# Altium PCB MOTHERBOARD.PcbDoc (part 3 of 3)
Units mm, origin at the board's own origin, x right, y up, seen from the top; angles counter-clockwise.
Board outline 187.14 x 77.14 mm, 4 copper layers (Top Layer, Top, Mid-Layer 1, Mid-Layer 2, Bottom Layer, Bottom), stack 0.462 mm thick; 249 components, 227 nets, 1108 pads, 518 vias.
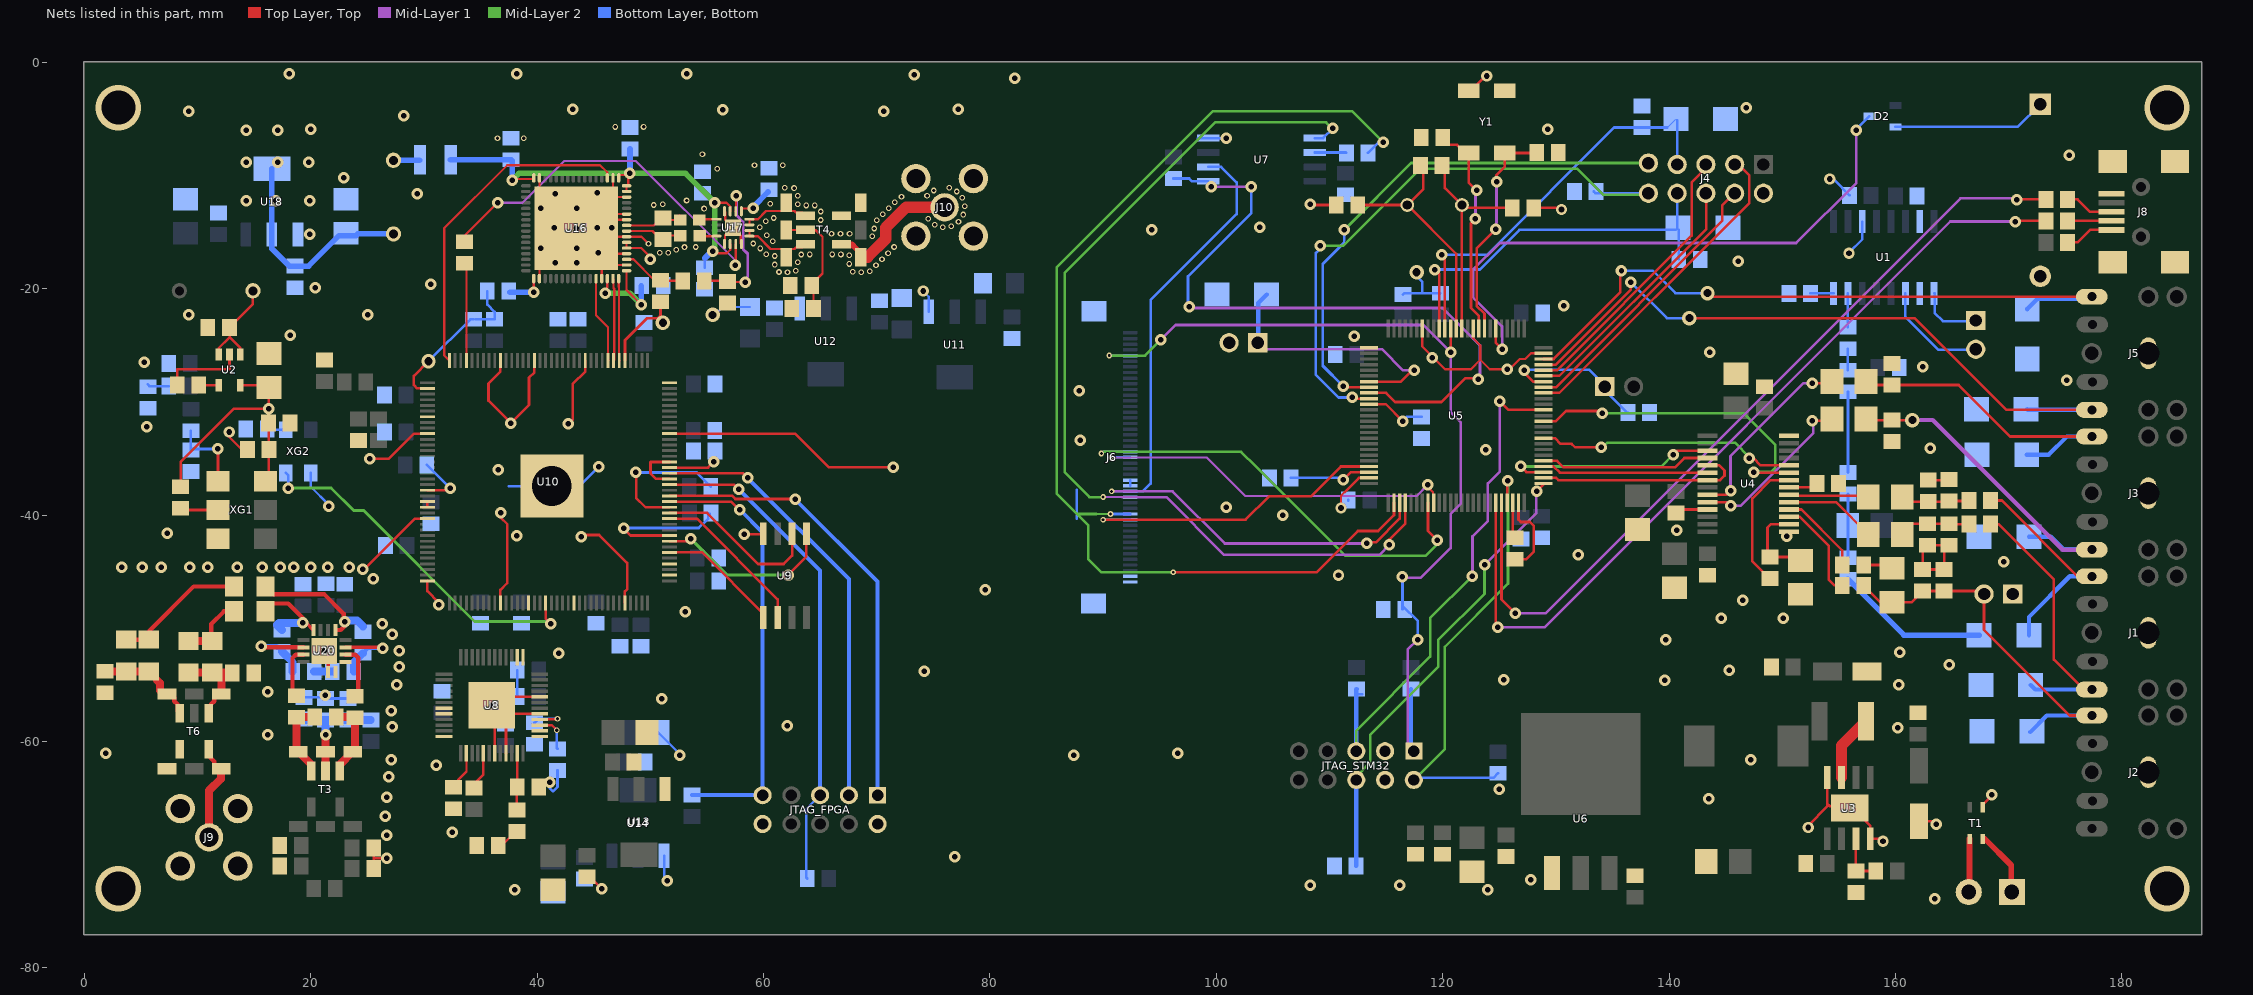
[diagram p5: the nets of this part, all layers, seen from the top]

## Via types
v1: diameter 1.016, hole 0.486, Top Layer, Top to Bottom Layer, Bottom, tented both sides, 338 vias
v2: diameter 0.5, hole 0.3, Top Layer, Top to Bottom Layer, Bottom, tented both sides, 87 vias
v3: diameter 0.5, hole 0.25, Top Layer, Top to Bottom Layer, Bottom, tented both sides, 39 vias
v4: diameter 1, hole 0.5, Top Layer, Top to Bottom Layer, Bottom, 27 vias
v5: diameter 1.27, hole 0.711, Top Layer, Top to Bottom Layer, Bottom, 15 vias
v6: diameter 1.016, hole 0.486, Top Layer, Top to Bottom Layer, Bottom, 7 vias
v7: diameter 4, hole 3, Top Layer, Top to Bottom Layer, Bottom, 4 vias
v8: diameter 0.5, hole 0.2, Top Layer, Top to Bottom Layer, Bottom, tented both sides, 1 vias

## Nets (pads, with @x,y where several pads share a name; then routed paths per layer and width w, separated by ;. In a path a pad name is that pad's centre, name@x,y a point inside that pad or via, vN(x,y) a via of type N, cw(c..) or ccw(c..) an arc to the next point about the centre after c; other vN are vias at no path point) (continued)
GND: B1.2 C1.2 C2.2 C3.1 C4.1 C5.1 C6.1 C7.1 C8.2 C9.1 C10.1 C11.1 C13.2 C14.2 C15.2 C16.2 C17.1 C18.1 C19.2 C20.2 C21.1 C22.2 C23.1 C24.2 C27.1 C28.1 C30.1 C31.1 C32.2 C36.1 C37.1 C38.2 C39.2 C40.1 C41.1 C42.1 C43.1 C44.1 C45.1 C46.1 C47.1 C48.1 C49.1 C50.1 C51.2 C52.2 C53.1 C54.2 C55.1 C56.1 C57.1 C58.1 C59.1 C60.2 C61.2 C62.2 C64.2 C65.2 C66.2 C67.2 C68.2 C69.2 C70.2 C71.1 C72.2 C73.2 C74.2 C75.2 C76.2 C77.2 C78.1 C79.2 C80.2 C81.1 C82.2 C83.1 C84.2 C85.2 C86.2 C87.2 C88.2 C89.1 C90.1 C91.2 C92.1 C93.1 C94.2 C95.2 C96.1 C97.1 C98.2 C99.2 C104.1 C112.2 C113.2 C114.2 C115.2 C116.1 C117.1 C118.1 C119.2 C120.2 C121.2 C122.2 C123.1 C124.1 C125.2 C126.2 C134.1 C135.1 C136.1 C137.1 D29.2 D30.2 D31.2 D34.2 D35.2 D36.2 D37.2 D38.2 D39.2 D40.2 J1.1 J2.1 J3.1 J4.2 J5.1 J6.27 J6.28 J6.44 J6.45 J6.46 J6.47 J8.5 J8.6 J8.7 J8.8 J8.9 J9.1 J9.2 J9.3 J9.4 J10.1 J10.2 J10.3 J10.4 JTAG_FPGA.2 JTAG_FPGA.10 JTAG_STM32.3 JTAG_STM32.4 MIC_IN2.1 PTT_IN.2 R1.1 R5.1 R6.1 R12.1 R13.1 R14.1 R15.1 R16.1 R17.1 R19.2 R22.2 R23.2 R26.2 R27.1 R28.1 R34.1 R35.1 R38.1 R46.1 R48.2 R49.2 R50.2 R56.1 R57.2 T1.1 T4.6 T4.10 T6.4 T6.11 U1.2 U1.11 U1.15 U2.2 U3.4 U3.8 U3.9 U4.11 U4.15 U4.22 U4.28 U5.10 U5.19 U5.26 U5.49 U5.74 U5.99 U6.1 U7.4 U8.1 U8.2 U8.19 U8.20 U8.24 U8.31 U8.33 U8.37 U8.38 U8.41 U8.44 U8.49 U9.4 U10.2 U10.4 U10.19 U10.22 U10.27 U10.36 U10.41 U10.48 U10.57 U10.63 U10.74 U10.79 U10.82 U10.94 U10.95 U10.97 U10.108 U10.118 U10.123 U10.131 U10.140 U10.145 U11.1 U12.1 U13.1 U14.1 U16.2 U16.4 U16.7 U16.10 U16.11 U16.14 U16.18 U16.31 U16.50 U16.61 U16.65 U17.4 U17.9 U17.12 U17.17 U18.1 U20.7 U20.8 U20.9 U20.17 XG1.3 XG2.2 Y1.2 Y1.3 | length 331.6
  Top Layer, Top w0.2: v4(12.8,-32.648) 12.652,-32.648 12.5,-32.8 13.9,-34.2 C10.1@14.4,-34.2 ; U10.95@30.3,-39.3 U10.94@30.3,-38.8 ; U16.50@40.2,-19.1 U16.65@40.2,-17.9 ; U16.65@40.2,-11.4 U16.31@40.2,-10.2 ; U16.65@44.2,-15.4 U16.7@47.9,-15.4 49.213,-15.4 v2(49.836,-16.023) ; U16.65@44.2,-13.9 U16.10@47.9,-13.9 ; U16.65@44.7,-13.4 U16.11@47.9,-13.4 ; U16.61@45.7,-19.1 45.7,-16.9 U16.4@47.9,-16.9 ; U16.65@46.2,-11.9 U16.14@47.9,-11.9 ; U16.65@46.7,-17.9 U16.2@47.9,-17.9 ; U16.65@46.7,-11.4 U16.18@46.7,-10.2 ; U17.9@56.55,-16.05 56.6,-16 56.6,-15.3 v8(57.3,-14.6) ; U17.4@56.55,-13.15 56.615,-13.215 56.615,-13.915 v8(57.3,-14.6) ; U17.12@58.05,-16.05 57.984,-15.984 57.984,-15.284 v8(57.3,-14.6) ; v4(111.017,-39.369) 111.017,-38.283 111.314,-37.986 ; U5.19@118.2,-23.5 118.2,-25.1 119.15,-26.05 120.2,-27.1 122.5,-27.1 123.326,-26.274 123.326,-26.259 ; U5.10@122.7,-23.5 122.7,-24.374 123.326,-25 123.326,-26.259 ; v1(125.7,-27.1) 124.167,-27.1 123.326,-26.259 ; v1@125.95,-27.067 126.817,-26.2 127.3,-26.2 127.8,-25.7 U5.99@128.9,-25.7
  Top Layer, Top w0.23: J9.4@8.114,-66.97 9.244,-65.84 J9.4@9.244,-65.26 ; C11.1@8.208,-28.505 8.193,-28.491 8.193,-27.122 12.813,-27.122 U2.2@12.814,-25.806 ; v1(24.6,-44.8) 24.7,-44.8 29.2,-40.3 U10.97@30.3,-40.3 ; v1(25.2,-35) 26.9,-35 28.7,-33.2 29.1,-32.8 U10.82@30.3,-32.8 ; C17.1@25.55,-71.2 25.55,-70.3 ; R34.1@25.55,-69.4 25.55,-70.3 ; v4(26.7,-70.3) 26.5,-70.3 25.55,-70.3 ; U10.108@30.3,-45.8 30.3,-46.7 31.3,-47.7 v1(31.3,-47.9) ; U10.74@30.3,-28.8 29.393,-28.8 29.1,-28.507 29.1,-27.7 v5(30.4,-26.4) ; U10.118@36.75,-47.75 36.75,-46.615 37.357,-46.008 37.357,-40.798 36.8,-40.241 v1(36.8,-39.8) ; U10.63@36.75,-26.35 36.75,-27.326 35.7,-28.376 35.7,-29.888 v1(37.673,-31.861) 39.278,-30.256 39.278,-27.851 39.75,-27.379 U10.57@39.75,-26.35 ; v1(43.906,-41.885) 44.038,-41.753 45.469,-41.753 47.947,-44.23 47.947,-46.55 47.75,-46.747 U10.140@47.75,-47.75 ; U10.48@44.25,-26.35 44.25,-27.29 43.13,-28.41 43.13,-31.544 ; C83.1@44.4,-71.95 44.65,-71.95 v4(45.7,-73) ; U10.19@51.7,-36.8 50.492,-36.8 50.01,-36.319 50.01,-35.3 U10.22@51.7,-35.3 ; U10.27@51.7,-32.8 62.8,-32.8 65.75,-35.75 v1(71.45,-35.75) ; v1(58.298,-41.703) 59.915,-41.703 U9.4@59.98,-41.638 ; v4(108.3,-12.538) 108.3,-12.5 108.4,-12.6 C43.1@110.6,-12.6 ; 111.314,-37.986 112.6,-36.7 U5.49@113.5,-36.7 ; Y1.3@122.3,-2.5 122.5,-2.5 123.8,-1.2 v4(123.9,-1.2) ; C41.1@126.4,-43.9 127.35,-43.9 128.05,-43.2 128.05,-40.95 127.7,-40.6 126.9,-40.6 126.7,-40.4 U5.74@126.7,-38.9 ; C42.1@128.05,-12.85 130.45,-12.85 130.6,-13 v4(130.5,-13) ; C23.1@140.6,-39.8 140.9,-39.5 U4.11@143.4,-39.5 ; C31.1@148.9,-45.6 148.884,-45.6 147.357,-44.073 147.357,-38.526 148.982,-36.9 U4.22@150.6,-36.9 ; v1(150.389,-41.841) 150.389,-41.662 U4.15@150.6,-41.45 ; v4@152.2,-67.8 152.3,-67.7 v4(152.3,-67.6) 152.3,-67.4 153.971,-65.729 153.971,-65.471 ; U3.8@153.971,-63.174 153.971,-65.471 ; v4@159,-68.9 v4(158.9,-68.8) 158.674,-68.574 U3.4@157.781,-68.574 157.781,-67.481 156.174,-65.874 U3.9@155.976,-65.874 155.802,-65.7 154.2,-65.7 153.971,-65.471 ; C1.2@162.067,-67.052 163.152,-67.052 163.4,-67.3 v4(163.6,-67.3) ; C28.1@162.9,-36.9 164.7,-36.9 R6.1@164.75,-36.85 ; T1.1@167.7,-65.8 167.7,-65.6 168.5,-64.8 v4(168.5,-64.7) ; 43.13,-31.544 v1(42.749,-31.925) 43.13,-31.544 ; C30.1@162.4,-44.8 162.4,-43.1 R5.1@162.85,-42.65 C27.1@164.75,-42.65 164.3,-43.1 R12.1@164.3,-44.8 C30.1@162.4,-44.8
  Top Layer, Top w0.25: U8.31@36.25,-61.038 U8.49@36.25,-57.05 ; U8.33@37.25,-61.038 37.25,-58.05 U8.49@36.75,-57.55 ; U8.41@40.238,-57.55 U8.49@36.75,-57.55 ; U8.44@40.238,-56.05 36.75,-56.05 v4(36,-56.8) U8.49@36.25,-57.05 ; U8.49@36.25,-57.05 U8.49@36.75,-57.55
  Top Layer, Top w0.254: U10.41@47.75,-26.35 47.75,-24.55 49.7,-22.6 50.7,-22.6 v5(51.1,-23) ; v5@50.688,-22.588 50.9,-22.377 C122.2@50.9,-21.15
  Top Layer, Top w0.3: U20.7@21.525,-53.85 U20.17@21.525,-52.325
  Top Layer, Top w0.381: v1(21.2,-52) U20.17@21.525,-52.325 ; U16.65@40.2,-17.9 v1(43.45,-14.65) ; U16.65@40.2,-11.4 v1(43.45,-14.65) ; U16.65@46.7,-17.9 45.7,-16.9 44.2,-15.4 v1(43.45,-14.65) ; U16.65@46.7,-11.4 46.2,-11.9 44.7,-13.4 44.2,-13.9 v1(43.45,-14.65)
  Bottom Layer, Bottom w0.2: XG2.2@19.996,-36.254 19.996,-37.496 21.6,-39.1 v4(21.6,-39.2) ; C75.2@50.7,-59.2 52.6,-61.1 v4(52.6,-61.2) ; v5(55.5,-22.296) 55.504,-22.3 55.686,-22.3 56.386,-21.6 C68.2@58.8,-21.6 ; v4(74.1,-20.2) 74.6,-20.7 U11.1@74.6,-22.028 ; C46.1@111.003,-39.383 v4(111.017,-39.369) C46.1@111.316,-39.07 ; C46.1@111.651,-38.735 C46.1@111.651,-38.647
  Bottom Layer, Bottom w0.23: R49.2@19.4,-56.1 21.2,-56.1 C93.1@21.3,-56.2 C104.1@23.3,-56.2 ; v5(30.4,-26.4) 34.101,-22.699 C82.2@34.378,-22.699 ; C82.2@34.599,-22.699 C74.2@36.241,-22.699 36.241,-22.041 35.6,-21.4 C114.2@35.6,-20.2 ; C96.1@37.2,-58.45 37.2,-58 v4(36,-56.8) 36.2,-56.8 37,-56 C97.1@38.25,-56 C55.1@38.25,-53.7 ; 37.5,-37.45 43.714,-37.45 v1(45.448,-35.717) ; v4(41.1,-63.6) 41.1,-64.1 41.4,-64.4 41.8,-64 C3.1@41.8,-62.55 ; U14.1@51.215,-70.1 51.215,-72.115 51.4,-72.3 v4(51.5,-72.3) ; 87.66,-40.32 87.66,-37.78 ; J6.28@92.4,-37.4 J6.27@92.4,-36.9 ; U7.4@99.3,-6.69 98.372,-6.69 98.382,-6.7 v1(100.9,-6.7) ; C52.2@116.5,-20.5 116.6,-20.4 118.2,-20.4 ; v5(117.7,-18.539) 117.327,-18.539 118.2,-19.412 118.2,-20.4 ; C51.2@119.8,-20.4 118.2,-20.4 ; v4(154.2,-10.3) 154.3,-10.4 154.6,-10.4 C15.2@155.95,-11.75 ; v4(155.9,-16.846) 155.9,-16.8 157.07,-15.63 U1.11@157.07,-14.06
  Bottom Layer, Bottom w0.5: R17.1@155.8,-45.65 160.75,-50.6 D37.2@167.4,-50.6
  other v1: 163.461,-73.881 38,-73.1 124,-73.1 108.3,-72.7 116.2,-72.7 127.8,-72.2 76.9,-70.2 26.7,-68.3 32.5,-68 26.6,-66.6 143.493,-65.075 26.7,-64.9 125,-64.2 26.9,-63.1 31.1,-62.1 27.1,-61.6 147.2,-61.6 87.4,-61.2 1.9,-61.05 96.614,-61.031 16.2,-59.4 160.2,-58.8 27.2,-58.7 62.093,-58.62 27.1,-57.3 51,-56.2 21.269,-55.9 16.2,-55.6 27.6,-55 160.3,-55 139.6,-54.6 125.384,-54.56 74.2,-53.8 145.3,-53.7 27.8,-53.4 164.75,-53.2 41.9,-52.2 160.4,-52.1 27.8,-52 139.7,-51 27.2,-50.5 26.3,-49.6 144.6,-49.1 150.1,-49.1 53.072,-48.53 146.5,-47.5 79.585,-46.59 25.5,-45.6 3.3,-44.6 5.1,-44.6 6.8,-44.6 9.3,-44.6 10.9,-44.6 13.5,-44.6 15.7,-44.6 17.3,-44.6 18.5,-44.6 20,-44.6 21.5,-44.6 23.4,-44.6 169.55,-44.1 132,-43.5 38.2,-41.8 7.3,-41.6 140.684,-41.317 100.9,-39.3 36.58,-35.974 123.8,-34.2 163.066,-34.094 88,-33.4 5.5,-32.2 87.9,-29 175.15,-28.1 162.4,-26.9 5.3,-26.5 119.1,-26.1 143.6,-25.6 112.2,-24.2 18.2,-24.1 9.2,-22.296 25.045,-22.296 130.7,-21.5 20.4,-19.9 41.6,-17.7 43.5,-17.7 146.113,-17.564 45.4,-16.8 40.3,-16.4 43.5,-16.4 19.9,-15.2 94.3,-14.8 41.5,-14.6 45.3,-14.6 46.6,-14.6 103.86,-14.557 40.3,-12.9 43.5,-12.9 29.4,-11.6 41.6,-11.6 45.3,-11.5 22.9,-10.2 175.345,-8.223 129.3,-5.9 28.2,-4.7 9.2,-4.3 70.6,-4.3 56.4,-4.2 43.14,-4.13 77.209,-4.13 146.8,-4 82.2,-1.4 73.3,-1.1 18.1,-1 38.2,-1 53.2,-1
  other v2: 62.118,-18.539 68.646,-18.539 61.364,-18.512 67.893,-18.493 69.393,-18.436 62.857,-18.392 69.935,-17.912 60.986,-17.859 67.586,-17.804 63.014,-17.655 70.468,-17.379 60.986,-17.105 67.586,-17.05 63.334,-16.972 64.088,-16.964 66.083,-16.964 66.837,-16.964 60.247,-16.956 71.002,-16.846 50.84,-16.814 51.594,-16.814 52.297,-16.539 59.704,-16.433 53.016,-16.314 54,-16.311 71.533,-16.311 59.089,-15.996 60.82,-15.791 69.6,-15.35 60.287,-15.257 66,-15.15 66.8,-15.15 67.6,-15.15 69.776,-14.67 59.678,-14.564 75.838,-14.558 76.586,-14.466 75.119,-14.331 77.229,-14.071 60.205,-14.025 70.013,-13.954 65.046,-13.923 74.561,-13.824 60.906,-13.747 77.643,-13.442 70.539,-13.414 65.049,-13.169 54.745,-12.911 71.072,-12.88 77.766,-12.698 63.761,-12.636 64.515,-12.636 50.3,-12.6 51.1,-12.538 63.014,-12.538 60.6,-12.5 71.605,-12.347 53.2,-12.2 77.565,-11.971 72.191,-11.872 63.014,-11.784 74.447,-11.776 77.073,-11.4 75.041,-11.313 62.697,-11.1 76.393,-11.073 61.86,-11.061 55.9,-9.4 59.2,-9.1 61.7,-9.1 54.6,-8.1 36.5,-6.69 38.8,-6.69 46.9,-5.7 49.4,-5.7
  other v4: 110.8,-45.3 105.883,-40.016
  other v6: 30.6,-19.6
  other v7: 3,-73 184,-73 3,-4 184,-4
KEY_IN_DASH: D34.1 J5.3 U5.97 | length 62.3
  Top Layer, Top w0.23: U5.97@128.9,-26.7 129.992,-26.7 136.6,-20.092 v1(136.6,-19.4) ; v5(141.8,-22.6) 161.7,-22.6 169.8,-30.7 J5.3@177.35,-30.7
  Bottom Layer, Bottom w0.23: v1(136.6,-19.4) 139.8,-22.6 v5(141.8,-22.6)
  Bottom Layer, Bottom w0.381: D34.1@171.65,-30.65 171.7,-30.7 J5.3@177.35,-30.7
KEY_IN_DOT: D35.1 J5.2 U5.98 | length 60.2
  Top Layer, Top w0.23: U5.98@128.9,-26.2 129.8,-26.2 135.7,-20.3 135.7,-18.5 v1(135.8,-18.4) ; v5(143.4,-20.39) 143.71,-20.7 J5.2@177.35,-20.7
  Mid-Layer 2 w0.23: v1(135.8,-18.4) 135.8,-18.45 135.95,-18.6 v1@135.973,-18.577
  Bottom Layer, Bottom w0.23: v1(135.8,-18.4) 138.561,-18.4 140.551,-20.39 v5(143.4,-20.39)
  Bottom Layer, Bottom w0.381: D35.1@171.65,-21.8 171.65,-21.775 172.535,-20.89 177.16,-20.89 J5.2@177.35,-20.7
Net13.8V_1: 13.8V.1 T1.2 | length 5.7
  Top Layer, Top w0.23: 13.8V.1@170.233,-73.3 13.8V.1@170.288,-73.3
  Top Layer, Top w0.5: 167.9,-68.6 170.233,-70.933 13.8V.1@170.233,-73.3
Net13.8V_2: 13.8V.2 T1.4 | length 4.7
  Top Layer, Top w0.5: 13.8V.2@166.478,-73.3 13.8V.2@166.483,-73.295 ; 13.8V.2@166.55,-73.295 T1.4@166.55,-68.6
NetB1_1: B1.1 D2.2 | length 13.6
  Bottom Layer, Bottom w0.23: D2.2@160,-5.7 170.8,-5.7 B1.1@172.8,-3.7
NetBOOT_1: BOOT.1 R28.2 U5.94 | length 13.7
  Top Layer, Top w0.23: v1@127.345,-27.144 126.944,-27.144 127.144,-27.344 128,-28.2 U5.94@128.9,-28.2
  Bottom Layer, Bottom w0.23: v1@127.345,-27.144 132.944,-27.144 134,-28.2 134,-28.641 136.306,-30.947 R28.2@136.381,-30.947
  other v1: 127.2,-27.2
NetC3_2: C3.2 U8.39 | length 3.4
  Top Layer, Top w0.23: U8.39@40.238,-58.55 41.288,-58.55 v2(41.738,-59)
  Bottom Layer, Bottom w0.23: v2(41.738,-59) 41.738,-60.588 C3.2@41.8,-60.65
NetC7_2: C7.2 L3.2 U2.1 U2.3 | length 8.8
  Top Layer, Top w0.23: U2.3@11.864,-25.806 11.864,-25.253 12.823,-24.294 12.823,-24.257 ; U2.1@13.764,-25.806 13.764,-25.198 12.823,-24.257 ; L3.2@14.887,-20.176 14.887,-21.35 C7.2@12.809,-23.428 12.823,-23.442 12.823,-24.257
NetC8_1: C8.1 C9.2 C10.2 C137.2 R3.1 U2.5 XG1.6 XG2.4 | length 26.8
  Top Layer, Top w0.23: R3.1@8.5,-37.5 8.5,-35.3 13.209,-30.591 v1(16.271,-30.591) ; U2.5@13.764,-28.507 16.089,-28.507 C8.1@16.3,-28.718 16.271,-28.747 v1(16.271,-30.591) ; XG1.6@16.2,-36.8 16.3,-36.7 C10.2@16.3,-34.2 16.271,-34.171 C9.2@16.271,-31.841 v1(16.271,-30.591) ; XG1.6@16.2,-36.8 XG1.6@16,-37 XG1.6@16.2,-36.8
  Bottom Layer, Bottom w0.23: C137.2@16.15,-32.4 16.204,-32.454 C137.2@16.271,-32.454 ; v1(16.271,-30.591) C137.2@16.271,-32.454 ; XG2.4@17.796,-32.454 C137.2@16.271,-32.454
NetC11_2: C11.2 U2.4 | length 1.8
  Top Layer, Top w0.23: C11.2@10.108,-28.505 10.109,-28.507 U2.4@11.864,-28.507
NetC12_1: C12.1 R8.2 | length 1.9
  Bottom Layer, Bottom w0.23: C12.1@155.8,-27.2 R8.2@155.8,-25.3
NetC12_2: C12.2 R18.2 | length 7.1
  Bottom Layer, Bottom w0.25: R18.2@155.8,-36.23 C12.2@155.8,-29.1
NetC13_1: C13.1 U1.8 | length 2
  Bottom Layer, Bottom w0.23: C13.1@152.5,-20.4 152.51,-20.41 U1.8@154.53,-20.41
NetC25_1: C25.1 U4.20 | length 7.1
  Top Layer, Top w0.23: U4.20@150.6,-38.2 150.6,-38.3 157.5,-38.3 C25.1@157.6,-38.4
NetC25_2: C25.2 C28.2 R6.2 R7.2 | length 6.1
  Top Layer, Top w0.23: C25.2@160.6,-38.4 161,-38.8 C28.2@162.9,-38.8 164.7,-38.8 R6.2@164.75,-38.75 166.45,-38.75 R7.2@166.5,-38.7
NetC26_1: C26.1 U4.19 | length 8.2
  Top Layer, Top w0.23: U4.19@150.6,-38.85 154.75,-38.85 C26.1@157.6,-41.7
NetC26_2: C26.2 C27.2 R5.2 R9.2 | length 6.3
  Top Layer, Top w0.23: C26.2@160.6,-41.7 161.55,-40.75 R5.2@162.85,-40.75 C27.2@164.75,-40.75 164.8,-40.8 R9.2@166.5,-40.8
NetC29_1: C29.1 R10.1 | length 2.6
  Top Layer, Top w0.23: R10.1@157.2,-44.4 159.4,-44.4 C29.1@159.7,-44.7
NetC29_2: C29.2 C30.2 D38.1 J2.2 MIC_IN2.2 R11.1 R12.2 | length 32.7
  Top Layer, Top w0.23: R11.1@157.2,-46.2 158.7,-47.7 C29.2@159.7,-47.7 161.4,-47.7 C30.2@162.4,-46.7 167,-46.7 ; MIC_IN2.2@167.83,-46.965 167.83,-50.13 175.4,-57.7 J2.2@177.35,-57.7
  Bottom Layer, Bottom w0.381: D38.1@171.9,-59.15 171.925,-59.15 173.375,-57.7 J2.2@177.35,-57.7
NetC31_2: C31.2 C32.1 U4.16 | length 7.5
  Top Layer, Top w0.23: U4.16@150.6,-40.8 149,-40.8 148.7,-41.1 148.7,-43.5 C31.2@148.9,-43.7 151.3,-43.7 C32.1@151.6,-44
NetC33_1: C33.1 U4.9 | length 16.9
  Top Layer, Top w0.23: U4.9@143.4,-38.2 145.074,-38.2 v1(145.431,-37.843) ; v1(152.672,-28.35) 154.25,-28.35 C33.1@154.4,-28.2
  Mid-Layer 1 w0.23: v1(145.431,-37.843) 145.431,-34.769 151.85,-28.35 v1(152.672,-28.35)
NetC33_2: C33.2 D40.1 J3.2 R15.2 | length 28.4
  Top Layer, Top w0.23: C33.2@157.4,-28.2 157.7,-28.5 R15.2@159.7,-28.5 165.592,-28.5 170.142,-33.05 J3.2@177.35,-33.05
  Bottom Layer, Bottom w0.381: D40.1@171.6,-34.65 173.55,-34.65 175.15,-33.05 J3.2@177.35,-33.05
NetC34_1: C34.1 U4.10 | length 15
  Top Layer, Top w0.23: U4.10@143.4,-38.85 145.154,-38.85 v1(145.468,-39.164) ; v1(152.672,-31.644) 154.256,-31.644 C34.1@154.4,-31.5
  Mid-Layer 1 w0.23: v1(145.468,-39.164) 146.343,-39.164 152.727,-32.78 152.727,-31.7 v1(152.672,-31.644)
NetC34_2: C34.2 D39.1 J3.3 R14.2 | length 31.2
  Top Layer, Top w0.23: C34.2@157.4,-31.5 157.5,-31.6 R14.2@159.7,-31.6 v5(161.5,-31.6)
  Mid-Layer 1 w0.381: v5(161.5,-31.6) 163.3,-31.6 174.75,-43.05 J3.3@177.35,-43.05
  Bottom Layer, Bottom w0.381: v5@161,-31.644 161.044,-31.6 v5(161.5,-31.6) ; D39.1@171.8,-41.9 173.726,-41.9 174.826,-43 J3.3@177.3,-43
NetC35_2: C35.2 R17.2 R18.1 | length 5.6
  Bottom Layer, Bottom w0.25: R17.2@155.8,-43.75 R18.1@155.8,-38.13
NetC36_2: C36.2 R44.2 U8.35 | length 5
  Top Layer, Top w0.2: R44.2@38.2,-66.05 38.2,-64.05 C36.2@38.25,-64 U8.35@38.25,-61.038
NetC37_2: C37.2 R44.1 | length 1.9
  Top Layer, Top w0.2: C37.2@36.85,-69.2 38.1,-67.95 R44.1@38.2,-67.95
NetC38_1: C38.1 U5.8 Y1.1 | length 19.6
  Top Layer, Top w0.23: U5.8@123.7,-23.5 123.7,-22.2 123,-21.5 123,-16.428 v1(124.703,-14.726) v1@124.7,-14.726 ; v1(124.757,-10.556) 124.757,-9.943 125.5,-9.2 Y1.1@125.5,-8 128.25,-8 C38.1@128.3,-7.95
  Mid-Layer 1 w0.23: v1(124.703,-14.726) 124.757,-14.671 v1(124.757,-10.556)
NetC39_1: C39.1 U5.9 Y1.4 | length 19.4
  Top Layer, Top w0.23: C39.1@120.15,-6.8 C39.1@120,-6.65 120,-6.75 120.535,-7.285 121.285,-7.285 122,-8 Y1.4@122.3,-8 122.3,-10.6 v1(123,-11.3) ; v1(122.9,-13.8) 122.5,-14.2 122.5,-21.7 123.2,-22.4 U5.9@123.2,-23.5
  Mid-Layer 1 w0.23: v1(122.9,-13.8) 122.9,-11.4 v1(123,-11.3)
NetC40_2: C40.2 U5.48 | length 7.3
  Top Layer, Top w0.23: v1(111.2,-36.882) 111.882,-36.2 U5.48@113.5,-36.2
  Bottom Layer, Bottom w0.25: C40.2@106.599,-36.7 111.018,-36.7 v1(111.2,-36.882)
NetC41_2: C41.2 U5.73 | length 3.2
  Top Layer, Top w0.23: U5.73@126.2,-38.9 126.2,-41.8 C41.2@126.4,-42
NetC42_2: C42.2 R29.1 U5.12 Y2.1 | length 19.7
  Top Layer, Top w0.23: R29.1@120.2,-9 120.2,-11.1 Y2.1@121.7,-12.6 ; U5.12@121.7,-23.5 Y2.1@121.7,-12.6 ; C42.2@126.15,-12.85 121.95,-12.85 Y2.1@121.7,-12.6
NetC43_2: C43.2 R29.2 U5.13 Y2.2 | length 21.3
  Top Layer, Top w0.23: C43.2@112.5,-12.6 Y2.2@116.874,-12.6 ; R29.2@118.3,-9 118.3,-11.174 Y2.2@116.874,-12.6 ; U5.13@121.2,-23.5 121.2,-16.926 Y2.2@116.874,-12.6
NetC63_2: C63.2 U8.29 | length 4.3
  Top Layer, Top w0.23: C63.2@34.382,-63.782 35.25,-62.915 U8.29@35.25,-61.038 ; C63.2@34.698,-64.629 34.698,-64.021 C63.2@34.819,-63.9 ; C63.2@34.698,-63.779 C63.2@34.819,-63.9 ; C63.2@35.019,-64.1 C63.2@34.819,-63.9
NetC93_2: C93.2 C104.2 R25.1 R49.1 T3.2 T3.8 | length 10.5
  Top Layer, Top w0.7: T3.8@21.3,-62.61 T3.2@21.3,-60.9 v1(21.3,-59.4)
  Bottom Layer, Bottom w0.7: R49.1@19.4,-58 19.4,-58.1 C93.2@21.3,-58.1 ; v1(21.3,-59.4) C93.2@21.3,-58.1 ; R25.1@25.3,-58.1 C104.2@23.3,-58.1 C93.2@21.3,-58.1
NetC102_1: C102.1 C106.1 R56.2 T6.1 T6.7 | length 8.2
  Top Layer, Top w0.381: T6.7@10.97,-57.51 11.16,-57.32 11.16,-56.74 11.465,-56.434 11.465,-56.109 11.775,-55.8 T6.1@12.1,-55.8 ; C102.1@12.1,-53.95 C102.1@12.15,-53.9
  Top Layer, Top w0.7: C106.1@9.2,-53.9 C102.1@11.3,-53.9 12.15,-53.9 13,-53.9 R56.2@13.05,-53.95 ; T6.1@12.1,-55.8 C102.1@12.1,-53.95
NetC102_2: C102.2 C106.2 R62.1 | length 5.9
  Top Layer, Top w0.381: C102.2@11.1,-51.1 11.2,-51 11.2,-49.622 12.322,-48.5 R62.1@13.2,-48.5
  Top Layer, Top w0.7: C106.2@9.2,-51.1 C102.2@11.1,-51.1
NetC103_1: C103.1 C105.1 R57.1 T6.3 T6.9 | length 9.2
  Top Layer, Top w0.381: C105.1@5.7,-53.8 5.8,-53.8 6.409,-54.41 C105.1@6.409,-54.585 ; T6.3@6.665,-55.49 6.975,-55.8 T6.3@7.3,-55.8 7.625,-55.8 7.934,-56.109 7.934,-56.434 8.24,-56.74 8.24,-57.32 T6.9@8.43,-57.51
  Top Layer, Top w0.7: R57.1@1.8,-53.8 C103.1@3.7,-53.8 C105.1@5.7,-53.8 ; C105.1@6.409,-54.585 6.665,-54.84 T6.3@6.665,-55.49
NetC103_2: C103.2 C105.2 R63.1 | length 11.9
  Top Layer, Top w0.381: C103.2@3.7,-51 C105.2@5.7,-51 5.7,-50.25 9.65,-46.3 R63.1@13.2,-46.3
NetC107_1: C107.1 R60.2 U20.11 | length 7.3
  Top Layer, Top w0.3: U20.11@23.05,-51.675 v1@26.244,-51.675
  Top Layer, Top w0.381: v1@26.244,-51.675 26.26,-51.66 v1(26.37,-51.77)
  Bottom Layer, Bottom w0.381: R60.2@24.6,-52.2 25.06,-51.741 26.341,-51.741 v1(26.37,-51.77)
  Bottom Layer, Bottom w0.7: C107.1@23.8,-53.8 23.8,-53 R60.2@24.6,-52.2
NetC107_2: C107.2 R61.2 | length 1.6
  Bottom Layer, Bottom w0.7: R61.2@20.3,-53.8 C107.2@21.9,-53.8
NetC112_1: C112.1 C113.1 C114.1 C115.1 C117.2 C118.2 C120.1 L7.2 U16.1 U16.5 U16.6 U16.15 U16.16 U16.17 U16.32 U16.49 U16.62 U17.1 U17.3 U17.10 | length 63.5
  Top Layer, Top w0.2: v1(37.8,-10.4) 37.9,-10.3 39.654,-10.3 39.7,-10.254 U16.32@39.7,-10.2 ; v1(39.7,-20.3) U16.49@39.7,-19.1 ; 46.2,-19.879 U16.62@46.2,-19.1 ; U16.17@47.2,-10.2 47.2,-10.002 47.246,-9.956 48.044,-9.956 v1@48.05,-9.95 ; U16.1@47.9,-18.4 47.9,-20.1 v1(49.2,-21.4) ; U16.6@47.9,-15.9 U16.5@47.9,-16.4 49.2,-16.4 50,-17.2 v1(50,-17.4) ; U16.15@47.9,-11.4 U16.16@47.9,-10.9 48.004,-10.9 48.05,-10.854 v1@48.05,-9.95 ; v1(48.2,-9.8) v1@48.05,-9.95 ; v1(55.5,-16.7) 55.65,-16.85 56.747,-16.85 57.05,-16.547 U17.10@57.05,-16.05 ; v1(55.7,-12.4) 56.726,-12.4 57.05,-12.724 U17.3@57.05,-13.15 ; U17.1@58.05,-13.15 58.05,-12.936 58.073,-12.912 59.088,-12.912 v1(59.1,-12.9)
  Mid-Layer 1 w0.5: v1(46,-20.39) v1@46.01,-20.4
  Mid-Layer 2 w0.5: v1(37.8,-10.4) 38.4,-9.8 v1(48.2,-9.8) 53.1,-9.8 v1(55.7,-12.4) 55.7,-16.5 v1(55.5,-16.7) ; v1(46,-20.39) 48.19,-20.39 v1(49.2,-21.4)
  Bottom Layer, Bottom w0.2: C114.1@37.5,-20.2 C114.1@37.6,-20.3 ; C113.1@37.7,-8.6 C113.1@37.8,-8.7 ; C112.1@49.2,-19.75 C112.1@49.25,-19.7 ; C120.1@54.8,-18.15 54.8,-17.3 ; v1(59.1,-12.9) v1@59.1,-12.75 ; C117.2@60.4,-11.45 C117.2@60.5,-11.45
  Bottom Layer, Bottom w0.5: L7.2@32.35,-8.6 34.8,-8.6 C113.1@37.7,-8.6 ; C114.1@37.6,-20.3 v1(39.7,-20.3) ; v1(37.8,-10.4) C113.1@37.8,-8.7 ; v1(48.2,-9.8) C115.1@48.2,-7.65 ; v1(49.2,-21.4) C112.1@49.2,-19.75 ; 54.8,-17.3 55.5,-16.6 v1(55.5,-16.7) ; v1@59.1,-12.75 C117.2@60.4,-11.45
NetC116_2: C116.2 C119.1 T4.2 T4.8 | length 10.2
  Top Layer, Top w0.2: T4.2@62,-14.8 T4.8@63.71,-14.8 64.6,-14.8 65.2,-15.4 65.2,-18.65 64.25,-19.6 C119.1@64.25,-19.7 64.405,-19.855 C116.2@64.405,-21.727
NetC121_1: C121.1 R67.1 U17.2 | length 13.2
  Top Layer, Top w0.2: R67.1@54.75,-19.3 56.75,-19.3 C121.1@56.8,-19.35 56.85,-19.4 v1(58.4,-19.4) ; U17.2@57.55,-13.15 57.56,-13.14 57.56,-11.84 v1(57.6,-11.8)
  Mid-Layer 1 w0.25: v1(57.6,-11.8) 57.6,-13.5 58.2,-14.1 58.2,-16.5 58.6,-16.9 58.6,-19.2 v1(58.4,-19.4)
NetC122_1: C122.1 R67.2 U16.3 | length 5.7
  Top Layer, Top w0.2: U16.3@47.9,-17.4 48.5,-17.4 50.35,-19.25 C122.1@50.9,-19.25 50.95,-19.3 R67.2@52.85,-19.3
NetC124_2: C124.2 C126.1 L8.1 U18.2 U18.4 | length 19.6
  Bottom Layer, Bottom w0.2: C126.1@24,-15.3 C126.1@24.15,-15.15
  Bottom Layer, Bottom w0.5: U18.4@16.561,-9.4 U18.2@16.561,-15.2 16.561,-16.461 18.1,-18 C124.2@18.604,-18 ; C124.2@18.604,-17.995 19.805,-17.995 22.5,-15.3 C126.1@24,-15.3 ; C126.1@24.15,-15.15 L8.1@27.3,-15.15
  other v1: 14.3,-12.2 16.9,-12.2 19.9,-12.2 14.3,-8.8 17.1,-8.8 19.8,-8.8 14.3,-6 17.1,-6 20,-5.9
NetC127_1: C127.1 R69.2 U16.8 | length 5.2
  Top Layer, Top w0.2: U16.8@47.9,-14.9 50.2,-14.9 50.7,-15.4 C127.1@51.15,-15.4 ; C127.1@51.45,-15.3 R69.2@52.413,-15.3
  Top Layer, Top w0.381: C127.1@51.1,-15.65 C127.1@51.45,-15.3 ; R69.2@52.413,-15.3 R69.2@52.582,-15.132
NetC127_2: C127.2 R68.2 U16.9 | length 5.1
  Top Layer, Top w0.2: U16.9@47.9,-14.4 50.3,-14.4 50.8,-13.9 C127.2@51.15,-13.9 ; C127.2@51.275,-13.925 R68.2@52.288,-13.925
  Top Layer, Top w0.381: C127.2@51.1,-13.75 C127.2@51.275,-13.925 ; R68.2@52.288,-13.925 R68.2@52.582,-13.632
NetC135_2: C135.2 R45.2 XG1.1 | length 7
  Top Layer, Top w0.23: XG1.1@11.8,-37 v1(11.8,-34.15)
  Bottom Layer, Bottom w0.23: R45.2@9.4,-32.55 C135.2@9.4,-34.25 9.5,-34.15 v1(11.8,-34.15)
NetC136_2: C136.2 R51.2 | length 1.9
  Bottom Layer, Bottom w0.23: C136.2@5.6,-28.45 5.75,-28.6 R51.2@7.45,-28.6
NetD2_3: D2.3 U5.6 | length 53.6
  Top Layer, Top w0.23: U5.6@124.7,-23.5 124.7,-24.781 v1(125.26,-25.34)
  Mid-Layer 1 w0.23: v1(125.26,-25.34) 125.26,-23.333 122.7,-20.773 122.7,-18.3 125.049,-15.951 151.233,-15.951 156.548,-10.635 156.548,-6.005 v1(156.556,-5.997)
  Bottom Layer, Bottom w0.23: v1(156.556,-5.997) 156.556,-5.894 D2.3@157.7,-4.75
NetD36_1: D36.1 J1.3 R9.1 | length 24.7
  Top Layer, Top w0.23: R9.1@168.4,-40.8 169.1,-40.8 174,-45.7 174,-52.75 176.65,-55.4 J1.3@177.35,-55.4
  Bottom Layer, Bottom w0.381: D36.1@171.95,-55 172.35,-55.4 J1.3@177.35,-55.4
NetD37_1: D37.1 J1.2 R7.1 | length 20.4
  Top Layer, Top w0.23: R7.1@168.4,-38.7 169.4,-38.7 176.1,-45.4 J1.2@177.35,-45.4
  Bottom Layer, Bottom w0.381: D37.1@171.8,-50.6 171.8,-49 175.4,-45.4 J1.2@177.35,-45.4
NetJ8_1: J8.1 R41.2 | length 4.4
  Top Layer, Top w0.23: R41.2@175.2,-15.9 176.1,-15.9 177.2,-14.8 J8.1@179.1,-14.8
NetJ8_2: J8.2 R43.1 | length 3.9
  Top Layer, Top w0.23: R43.1@175.2,-14 J8.2@179.1,-14
NetJ8_3: J8.3 R42.1 | length 4.4
  Top Layer, Top w0.23: R42.1@175.2,-12.1 176.1,-12.1 177.2,-13.2 J8.3@179.1,-13.2
NetJ9_5: J9.5 T6.6 T6.10 | length 8.9
  Top Layer, Top w0.381: T6.10@10.97,-60.69 11.16,-60.879 11.16,-61.46 11.465,-61.766 11.465,-62.09 11.775,-62.4 T6.6@12.1,-62.4 T6.6@12.05,-62.45
  Top Layer, Top w0.7: J9.5@11.014,-68.465 11.014,-64.336 12.05,-63.3 T6.6@12.05,-62.45
NetJ10_5: J10.5 T4.4 T4.11 | length 12.3
  Top Layer, Top w0.2: T4.4@68.2,-16.475 68.6,-16.875 T4.4@68.6,-17.2
  Top Layer, Top w0.5: T4.11@66.89,-16.07 67.795,-16.07 T4.4@68.2,-16.475 ; T4.4@68.6,-17.2 69.2,-17.2 ; J10.5@75.922,-12.878 J10.5@76,-12.8
  Top Layer, Top w1: 69.2,-17.2 70.8,-15.6 70.8,-14.6 72.6,-12.8 J10.5@76,-12.8
NetJTAG_FPGA_1: JTAG_FPGA.1 U10.16 | length 40.4
  Top Layer, Top w0.23: U10.16@51.7,-38.3 57.236,-38.3 57.511,-38.575 62.775,-38.575 v1(62.8,-38.6)
  Bottom Layer, Bottom w0.35: v1(62.8,-38.6) 70.079,-45.879 JTAG_FPGA.1@70.079,-64.745
NetJTAG_FPGA_3: JTAG_FPGA.3 U10.20 | length 38.8
  Top Layer, Top w0.23: U10.20@51.7,-36.3 58.2,-36.3 v1(58.6,-36.7)
  Bottom Layer, Bottom w0.35: v1(58.6,-36.7) 67.539,-45.639 JTAG_FPGA.3@67.539,-64.745
NetJTAG_FPGA_5: JTAG_FPGA.5 R31.1 U10.18 | length 44.2
  Top Layer, Top w0.23: U10.18@51.7,-37.3 57.39,-37.3 v1@57.795,-37.705
  Bottom Layer, Bottom w0.23: R31.1@63.85,-72.1 63.761,-72.011 63.761,-65.982 JTAG_FPGA.5@64.999,-64.745
  Bottom Layer, Bottom w0.35: v1(57.8,-37.7) 64.999,-44.899 JTAG_FPGA.5@64.999,-64.745
NetJTAG_FPGA_9: JTAG_FPGA.9 R32.1 U10.15 | length 38.8
  Top Layer, Top w0.23: U10.15@51.7,-38.8 57.128,-38.8 57.828,-39.5 v1(57.9,-39.5)
  Bottom Layer, Bottom w0.3: JTAG_FPGA.9@59.893,-64.719 JTAG_FPGA.9@59.919,-64.745
  Bottom Layer, Bottom w0.35: R32.1@53.689,-64.719 JTAG_FPGA.9@59.893,-64.719 ; v1(57.9,-39.5) 59.919,-41.519 JTAG_FPGA.9@59.919,-64.745
NetL1_1: L1.1 U3.7 | length 5.9
  Top Layer, Top w1: U3.7@155.241,-63.174 155.241,-60.359 L1.1@157.4,-58.2
NetL7_1: L7.1 L8.2 | length 2.4
  Bottom Layer, Bottom w0.2: L7.1@29.6,-8.65 L7.1@29.65,-8.6
  Bottom Layer, Bottom w0.5: L8.2@27.3,-8.65 L7.1@29.6,-8.65
NetR1_2: R1.2 R2.1 U3.3 | length 4.6
  Top Layer, Top w0.23: R1.2@156.511,-71.433 158.252,-71.433 R2.1@158.26,-71.426 ; R1.2@156.511,-71.433 U3.3@156.511,-68.574
NetR3_2: R3.2 XG1.2 | length 3.4
  Top Layer, Top w0.23: R3.2@8.5,-39.4 8.64,-39.54 XG1.2@11.8,-39.54
NetR8_1: R8.1 U1.7 | length 3
  Bottom Layer, Bottom w0.23: R8.1@155.8,-23.4 U1.7@155.8,-20.41
NetR10_2: R10.2 U4.18 | length 7.5
  Top Layer, Top w0.23: U4.18@150.6,-39.5 151.7,-39.5 155.3,-43.1 R10.2@155.3,-44.4
NetR11_2: R11.2 U4.17 | length 9
  Top Layer, Top w0.23: U4.17@150.6,-40.15 151.55,-40.15 154.1,-42.7 154.1,-45.7 154.6,-46.2 R11.2@155.3,-46.2
NetR13_2: R13.2 U4.21 | length 2.6
  Top Layer, Top w0.23: U4.21@150.6,-37.55 152.732,-37.55 R13.2@153.078,-37.204
NetR16_2: R16.2 U8.40 | length 3.8
  Top Layer, Top w0.23: U8.40@40.238,-58.05 40.263,-58.025 41.775,-58.025 v2(41.8,-58)
  Bottom Layer, Bottom w0.23: R16.2@39.75,-58.35 40.1,-58 v2(41.8,-58)
NetR24_2: R24.2 U10.92 | length 5
  Top Layer, Top w0.23: U10.92@30.3,-37.8 32.1,-37.8 v1(32.3,-37.6)
  Bottom Layer, Bottom w0.23: R24.2@30.25,-35.55 v1(32.3,-37.6)
NetR27_2: R27.2 U5.36 | length 5.4
  Top Layer, Top w0.23: U5.36@113.5,-30.2 114.977,-30.2 v1(116.467,-31.69)
  Bottom Layer, Bottom w0.23: v1(116.467,-31.69) 116.838,-31.319 R27.2@118.147,-31.319
NetR30_1: R30.1 U10.9 | length 12.6
  Top Layer, Top w0.23: v1(47.629,-41.162) 48.267,-41.8 U10.9@51.7,-41.8
  Bottom Layer, Bottom w0.23: v1(47.629,-41.162) 47.657,-41.135 54.265,-41.135 55.123,-40.277 55.123,-39.966 R30.1@55.224,-39.866
NetR40_1: R40.1 U7.6 | length 2.8
  Bottom Layer, Bottom w0.23: U7.6@108.7,-7.96 111.46,-7.96 R40.1@111.495,-7.995
NetR42_2: R42.2 U5.71 | length 72.4
  Top Layer, Top w0.23: U5.71@125.2,-38.9 125.2,-47.455 v1(126.417,-48.672) ; v1(170.704,-12.124) 170.729,-12.1 R42.2@173.3,-12.1
  Mid-Layer 1 w0.23: v1(126.417,-48.672) 129.082,-48.672 165.741,-12.014 170.594,-12.014 v1(170.704,-12.124)
NetR43_2: R43.2 U5.70 | length 74.4
  Top Layer, Top w0.23: U5.70@124.7,-38.9 124.7,-49.73 v1(124.881,-49.911) ; v1(170.573,-14.056) 170.628,-14 R43.2@173.3,-14
  Mid-Layer 1 w0.23: v1(124.881,-49.911) 128.989,-49.911 164.844,-14.056 v1(170.573,-14.056)
NetR46_2: R46.2 U8.26 | length 3.5
  Top Layer, Top w0.2: R46.2@32.6,-64.05 32.7,-64.05 33,-63.75 33,-63.4 33.75,-62.65 U8.26@33.75,-61.038
NetR47_1: R47.1 U10.14 | length 12.7
  Top Layer, Top w0.23: v1(48.719,-36.23) 48.747,-36.23 48.747,-38.464 49.582,-39.3 U10.14@51.7,-39.3
  Bottom Layer, Bottom w0.23: v1(48.719,-36.23) 54.088,-36.23 R47.1@55.324,-37.466
NetR48_1: R48.1 U10.21 | length 4.1
  Top Layer, Top w0.23: U10.21@51.7,-35.8 55.1,-35.8 v1(55.6,-35.3)
NetR53_1: R53.1 R58.2 T3.1 T3.7 | length 6.9
  Top Layer, Top w0.7: R53.1@22.25,-57.85 23.85,-57.85 R58.2@23.9,-57.9 23.9,-60.7 T3.1@23.7,-60.9 22.57,-62.03 T3.7@22.57,-62.61
NetR53_2: R53.2 R54.1 T3.3 T3.9 | length 6.9
  Top Layer, Top w0.7: T3.9@20.03,-62.61 20.03,-62.03 T3.3@18.9,-60.9 18.75,-60.75 R54.1@18.75,-57.85 R53.2@20.35,-57.85
NetR54_2: R54.2 U20.3 | length 4.6
  Top Layer, Top w0.381: R54.2@18.7,-55.9 18.385,-55.585 18.385,-52.618 18.677,-52.325 U20.3@19.35,-52.325
  Top Layer, Top w0.7: R54.2@18.7,-55.9 R54.2@18.75,-55.95
NetR58_1: R58.1 U20.10 | length 4.8
  Top Layer, Top w0.381: U20.10@23.05,-52.325 23.925,-52.325 24.2,-52.6 24.2,-55.7 R58.1@23.9,-56
NetR59_1: R59.1 R62.2 U20.16 | length 8.7
  Top Layer, Top w0.3: v1@19.592,-49.517 U20.16@20.225,-50.15
  Top Layer, Top w0.381: R62.2@16,-48.5 16.7,-47.8 18,-47.8 19.283,-49.083 v1(19.283,-49.517) v1@19.592,-49.517
  Bottom Layer, Bottom w0.7: R59.1@17.45,-50.15 17,-49.7 17.183,-49.517 v1(19.283,-49.517)
NetR59_2: R59.2 R61.1 U20.2 | length 7.5
  Top Layer, Top w0.381: v1@16,-51.675 U20.2@19.35,-51.675
  Bottom Layer, Bottom w0.381: v1(15.609,-51.591) 16.99,-51.591 R59.2@17.45,-52.05
  Bottom Layer, Bottom w0.7: R59.2@17.45,-52.05 18.4,-53 R61.1@18.4,-53.8
NetR60_1: R60.1 R63.2 U20.13 | length 11.6
  Top Layer, Top w0.381: R63.2@16,-46.3 16.7,-47 21.2,-47 22.92,-48.72 22.92,-49.32 v1(23,-49.4) ; 22.4,-50.15 22.65,-50.15 v1@23.2,-49.6
  Bottom Layer, Bottom w0.7: v1(23,-49.4) 23.1,-49.3 24.1,-49.3 R60.1@24.63,-49.83
NetR66_1: R66.1 U17.11 | length 33.1
  Top Layer, Top w0.2: R66.1@33.6,-15.85 33.6,-15.3 v1(36.5,-12.4) ; v1(57.5,-17.9) 57.54,-17.86 57.54,-16.06 U17.11@57.55,-16.05
  Mid-Layer 1 w0.2: v1(36.5,-12.4) 38.7,-12.4 42.4,-8.7 48.713,-8.7 57.5,-17.487 v1(57.5,-17.9)
NetR68_1: R68.1 U17.5 | length 1.6
  Top Layer, Top w0.2: R68.1@54.4,-13.85 U17.5@55.85,-13.85
  Top Layer, Top w0.381: R68.1@54.325,-13.925 R68.1@54.4,-13.85
NetR69_1: R69.1 U17.8 | length 1.3
  Top Layer, Top w0.2: R69.1@54.6,-15.35 U17.8@55.85,-15.35
NetSPEAKER_1: SPEAKER.1 U1.1 | length 5.3
  Bottom Layer, Bottom w0.23: U1.1@163.42,-20.41 163.462,-20.41 163.462,-22.131 164.191,-22.86 SPEAKER.1@166.7,-22.86
NetSPEAKER_2: SPEAKER.2 U1.3 | length 9.1
  Bottom Layer, Bottom w0.23: U1.3@160.88,-20.41 160.872,-20.418 160.872,-22.482 163.79,-25.4 SPEAKER.2@166.7,-25.4
NetT4_1: T4.1 T4.7 U17.15 U17.16 | length 6.6
  Top Layer, Top w0.2: U17.15@58.75,-14.35 U17.16@58.75,-13.85 59.5,-13.85 60.225,-13.125 61.6,-13.125 T4.1@62,-12.725 ; T4.1@62,-12.4 T4.1@62,-12.725 ; T4.7@63.71,-13.53 63.43,-13.25 62.85,-13.25 62.725,-13.125 62.4,-13.125 T4.1@62,-12.725
NetT4_3: T4.3 T4.9 U17.13 U17.14 | length 6.8
  Top Layer, Top w0.2: U17.14@58.75,-14.85 U17.13@58.75,-15.35 59.5,-15.35 60.625,-16.475 61.6,-16.475 T4.3@62,-16.875 ; T4.3@62,-17.2 T4.3@62,-16.875 ; T4.9@63.71,-16.07 63.43,-16.35 62.85,-16.35 62.725,-16.475 62.4,-16.475 T4.3@62,-16.875
NetU9_1: U9.1 U10.8 | length 16.2
  Top Layer, Top w0.23: U10.8@51.7,-42.3 53.39,-42.3 v1(53.588,-42.102) ; v1(62.172,-45.29) 63.79,-43.672 U9.1@63.79,-41.638
  Mid-Layer 2 w0.3: v1(53.588,-42.102) 56.776,-45.29 v1(62.172,-45.29)
NetU9_2: U9.2 U10.13 | length 14.9
  Top Layer, Top w0.23: U10.13@51.7,-39.8 55.019,-39.8 59.53,-44.311 61.776,-44.311 62.526,-43.561 62.526,-41.643 U9.2@62.52,-41.638
NetU9_5: U9.5 U10.6 | length 10.9
  Top Layer, Top w0.23: U10.6@51.7,-43.3 51.726,-43.274 54.542,-43.274 59.98,-48.713 U9.5@59.98,-49.038
NetU9_6: U9.6 U10.12 | length 14.1
  Top Layer, Top w0.23: U10.12@51.7,-40.3 51.703,-40.303 54.105,-40.303 61.25,-47.448 U9.6@61.25,-49.038
OFA: U10.44 U16.60 | length 7.8
  Top Layer, Top w0.2: U16.60@45.2,-19.1 45.192,-19.108 45.192,-22.343 46.25,-23.401 U10.44@46.25,-26.35 U10.44@46.3,-26.3
PERI_MISO: J6.29 U5.53 U7.2 | length 66.2
  Top Layer, Top w0.23: v1(113.3,-42.5) 113.4,-42.4 114.1,-42.4 116.2,-40.3 U5.53@116.2,-38.9
  Mid-Layer 1 w0.23: v3(90.75,-37.9) 96.15,-37.9 100.75,-42.5 v1(113.3,-42.5)
  Bottom Layer, Bottom w0.23: v3(90.75,-37.9) J6.29@92.4,-37.9 93.5,-37.9 94.2,-37.2 94.2,-21 101.8,-13.4 101.8,-10.6 100.43,-9.23 U7.2@99.3,-9.23
PERI_MOSI: J6.30 U5.54 U7.5 | length 87.8
  Top Layer, Top w0.23: v1(115.3,-42.6) 115.3,-42.136 116.7,-40.736 U5.54@116.7,-38.9
  Mid-Layer 1 w0.2: v3(90,-38.4) 91.7,-38.4
  Mid-Layer 1 w0.23: 91.7,-38.4 95.6,-38.4 100.7,-43.5 114.4,-43.5 v1(115.3,-42.6)
  Mid-Layer 2 w0.23: v3(90,-38.4) 88.8,-38.4 86.6,-36.2 86.6,-18.6 99.9,-5.3 109.7,-5.3 110.293,-5.893 v1(110.293,-5.838)
  Bottom Layer, Bottom w0.2: v3(90,-38.4) J6.30@92.4,-38.4
  Bottom Layer, Bottom w0.23: U7.5@108.7,-6.69 109.441,-6.69 v1(110.293,-5.838)
PERI_SCK: J6.33 R40.2 U5.52 | length 99.8
  Top Layer, Top w0.23: v3(96.2,-45.05) 108.85,-45.05 112.5,-41.4 114.3,-41.4 115.7,-40 U5.52@115.7,-38.9
  Mid-Layer 2 w0.2: 89.4,-39.9 v3(90.65,-39.9)
  Mid-Layer 2 w0.23: 89.4,-39.9 87.7,-39.9 ; v3(96.2,-45.05) 89.85,-45.05 88.7,-43.9 88.7,-40.9 87.7,-39.9 ; v1(114.762,-7.035) 114.735,-7.035 112,-4.3 99.7,-4.3 85.9,-18.1 85.9,-38.1 87.7,-39.9
  Bottom Layer, Bottom w0.23: v3(90.65,-39.9) J6.33@92.4,-39.9 ; R40.2@113.395,-7.995 114.355,-7.035 v1(114.762,-7.035)
PGA: U10.42 U16.64 | length 7.3
  Top Layer, Top w0.2: U16.64@47.2,-19.1 47.2,-19.825 47.225,-19.85 47.225,-26.325 U10.42@47.25,-26.35
PREAMP: R66.2 U10.69 | length 8.7
  Top Layer, Top w0.2: R66.2@33.6,-17.75 33.75,-17.9 U10.69@33.75,-26.35
PTT_IN: D31.1 PTT_IN.1 U5.32 | length 24
  Top Layer, Top w0.23: U5.32@113.5,-28.2 116.302,-28.2 117.302,-27.2 v1(117.5,-27.2)
  Mid-Layer 1 w0.23: PTT_IN.1@103.569,-24.736 103.836,-24.736 104.44,-25.34 114.64,-25.34 116.5,-27.2 v1(117.5,-27.2)
  Bottom Layer, Bottom w0.381: PTT_IN.1@103.7,-24.8 103.7,-21.25 D31.1@104.45,-20.5
PWR_HOLD: J6.23 U5.59 | length 33.3
  Top Layer, Top w0.2: v1(118.7,-37.3) 118.7,-37.521 119.15,-37.971 119.15,-38.85 U5.59@119.2,-38.9
  Mid-Layer 1 w0.2: v3(90.7,-34.9) 99.15,-34.9 102.55,-38.3 117.7,-38.3 v1(118.7,-37.3)
  Bottom Layer, Bottom w0.23: v3(90.7,-34.9) J6.23@92.4,-34.9
PWR_ON: J6.22 U5.58 | length 40.6
  Top Layer, Top w0.23: U5.58@118.7,-38.9 118.7,-41.4 v1(119.5,-42.2)
  Mid-Layer 2 w0.2: v3(89.85,-34.55) 90,-34.4 91.5,-34.4
  Mid-Layer 2 w0.23: 91.5,-34.4 102.2,-34.4 103.517,-35.717 111.4,-43.6 118.5,-43.6 119.4,-42.7 119.4,-42.2 v1(119.5,-42.2)
  Bottom Layer, Bottom w0.2: v3(89.85,-34.55) 90,-34.4 J6.22@92.4,-34.4
RAND: U10.43 U16.63 | length 7.3
  Top Layer, Top w0.2: U16.63@46.7,-19.1 46.75,-19.15 46.75,-19.941 46.808,-19.999 46.808,-21.035 46.8,-21.043 46.8,-26.3 U10.43@46.75,-26.35
RFUNT_ALC: J4.10 R50.1 U5.35 | length 54.8
  Top Layer, Top w0.23: v1(112,-29.6) 112.1,-29.7 U5.35@113.5,-29.7
  Mid-Layer 2 w0.23: v6(109.2,-16.2) 111.2,-16.2 118,-9.4 131.9,-9.4 134.2,-11.7 138.04,-11.7 J4.10@138.18,-11.56
  Bottom Layer, Bottom w0.23: v6(109.2,-16.2) 109.2,-16.435 108.8,-16.835 108.8,-27.6 110.8,-29.6 v1(112,-29.6) ; R50.1@133.35,-11.4 133.51,-11.56 J4.10@138.18,-11.56
RFUNT_CLK: J4.4 U5.93 | length 24.8
  Top Layer, Top w0.23: U5.93@128.9,-28.7 130,-28.7 144.7,-14 144.7,-12.66 J4.4@145.8,-11.56
RFUNT_DATA: J4.6 U5.95 | length 22.9
  Top Layer, Top w0.23: U5.95@128.9,-27.7 130.3,-27.7 143.3,-14.7 143.3,-11.6 J4.6@143.26,-11.56
RFUNT_OE: J4.5 U5.96 | length 25.3
  Top Layer, Top w0.23: U5.96@128.9,-27.2 130.1,-27.2 142,-15.3 142,-10.6 143.58,-9.02 J4.5@143.26,-9.02
RFUNT_RCLK: J4.3 U5.92 | length 29.3
  Top Layer, Top w0.23: U5.92@128.9,-29.2 130.3,-29.2 147.1,-12.4 147.1,-10 146.12,-9.02 J4.3@145.8,-9.02
RFUNT_THERM: J4.9 U5.33 | length 47
  Top Layer, Top w0.23: v1(111.2,-28.6) 111.3,-28.7 U5.33@113.5,-28.7
  Mid-Layer 2 w0.25: v6(111.3,-14.8) 117.207,-8.893 J4.9@138.18,-8.893
  Bottom Layer, Bottom w0.25: v1(111.2,-28.6) 109.4,-26.8 109.4,-17.8 111.3,-15.9 v6(111.3,-14.8)
SD_CS: J6.34 U5.47 | length 27.8
  Top Layer, Top w0.2: v3(90,-40.4) 91.6,-40.4
  Top Layer, Top w0.23: 91.6,-40.4 102.6,-40.4 104.665,-38.335 108.365,-38.335 111,-35.7 U5.47@113.5,-35.7
  Bottom Layer, Bottom w0.2: v3(90,-40.4) J6.34@92.4,-40.4
SHDN: U10.72 U16.19 | length 29.4
  Top Layer, Top w0.2: U10.72@32.25,-26.35 31.8,-25.9 31.8,-14.634 37.359,-9.075 45.552,-9.075 46.181,-9.704 46.181,-10.181 U16.19@46.2,-10.2
STM_NRST: C57.2 J6.5 JTAG_STM32.1 R33.1 U5.14 | length 82.3
  Top Layer, Top w0.23: v1(120.7,-25.6) U5.14@120.7,-23.5
  Mid-Layer 1 w0.23: v6(95.1,-24.5) 96.4,-23.2 118.3,-23.2 v1(120.7,-25.6) 120.7,-30.9 121.61,-31.81 121.61,-38.99 120.7,-39.9 120.7,-42.9 118.059,-45.541 116.529,-45.541 v1(116.451,-45.462) ; JTAG_STM32.1@117.45,-60.85 116.9,-60.3 116.9,-51.889 v1(117.802,-50.987)
  Mid-Layer 2 w0.23: v3(90.55,-25.9) 93.7,-25.9 v6(95.1,-24.5)
  Bottom Layer, Bottom w0.23: v3(90.55,-25.9) J6.5@92.4,-25.9 ; C57.2@116.451,-48.32 v1(116.451,-45.462) ; C57.2@116.469,-48.019 117.802,-49.352 v1(117.802,-50.987) ; R33.1@117.025,-55.525 R33.1@117.2,-55.35
  Bottom Layer, Bottom w0.381: R33.1@117.2,-55.35 117.2,-60.6 JTAG_STM32.1@117.45,-60.85
SWCLK: JTAG_STM32.6 R38.2 U5.76 | length 40.3
  Top Layer, Top w0.23: v1(128.3,-37.9) 128.9,-37.3 U5.76@128.9,-37.215
  Mid-Layer 1 w0.23: v1(123.699,-44.395) 128.252,-39.841 v1@128.252,-37.9
  Mid-Layer 2 w0.23: JTAG_STM32.6@112.37,-63.071 113.599,-61.843 113.599,-59.401 114.765,-58.235 119.6,-53.4 119.6,-51.047 123.699,-46.949 v1(123.699,-44.395)
  Bottom Layer, Bottom w0.381: R38.2@112.35,-71 112.37,-70.98 JTAG_STM32.6@112.37,-63.39
SWDIO: JTAG_STM32.2 R36.2 U5.72 | length 39.5
  Top Layer, Top w0.23: U5.72@125.7,-38.9 125.7,-37.039 v1(125.771,-36.968)
  Mid-Layer 2 w0.23: JTAG_STM32.2@117.45,-63.39 120.2,-60.64 120.2,-51.625 125.771,-46.054 v1(125.771,-36.968)
  Bottom Layer, Bottom w0.23: JTAG_STM32.2@117.45,-63.39 117.64,-63.2 124.5,-63.2 R36.2@124.9,-62.8
SWO: JTAG_STM32.5 R37.2 U5.89 | length 46.2
  Top Layer, Top w0.23: v1(125.055,-29.936) 125.819,-30.7 U5.89@128.9,-30.7
  Mid-Layer 1 w0.23: v1(122.597,-45.4) 122.633,-45.4 122.633,-41.867 124,-40.5 124,-37.202 125.055,-36.147 v1(125.055,-29.936)
  Mid-Layer 2 w0.23: JTAG_STM32.5@112.37,-60.85 112.37,-59.03 118.9,-52.5 118.9,-49.097 v1(122.597,-45.4)
  Bottom Layer, Bottom w0.23: R37.2@112.525,-55.825 R37.2@112.875,-55.825
  Bottom Layer, Bottom w0.381: JTAG_STM32.5@112.37,-60.85 112.37,-55.38 R37.2@112.4,-55.35
SWR_BACKW: D29.1 J4.8 R19.1 U5.16 | length 34.2
  Top Layer, Top w0.23: v1(119.3,-18.3) 119.7,-18.7 U5.16@119.7,-23.5
  Bottom Layer, Bottom w0.089: D29.1@140.6,-14.8 140.72,-14.68 D29.1@140.85,-14.81
  Bottom Layer, Bottom w0.23: v1(119.3,-18.3) 123.279,-18.3 126.779,-14.8 D29.1@140.6,-14.8 ; D29.1@140.72,-14.68 J4.8@140.72,-11.56 ; R19.1@140.85,-17.4 D29.1@140.85,-14.81
SWR_FORW: D30.1 J4.7 R26.1 U5.15 | length 36.4
  Top Layer, Top w0.23: v1(119.9,-17) 120.2,-17.3 U5.15@120.2,-23.5
  Bottom Layer, Bottom w0.089: D30.1@139.85,-5.75 D30.1@140.6,-5 D30.1@140.72,-5.12
  Bottom Layer, Bottom w0.23: v1(119.9,-17) 123.9,-17 135.15,-5.75 R26.1@137.6,-5.75 D30.1@139.85,-5.75 ; J4.7@140.72,-9.02 D30.1@140.72,-5.12
TCXO_CLK: U10.126 XG2.3 | length 31.6
  Top Layer, Top w0.23: U10.126@40.75,-47.75 40.75,-49.15 v1(41.2,-49.6)
  Mid-Layer 2 w0.25: v1(18,-37.6) 21.8,-37.6 23.8,-39.6 24.675,-39.6 34.475,-49.4 41,-49.4 v1(41.2,-49.6)
  Bottom Layer, Bottom w0.23: XG2.3@17.796,-36.254 18,-36.458 v1(18,-37.6)
W26Q16_CS: R39.2 U5.34 U7.1 | length 60.6
  Top Layer, Top w0.23: U5.34@113.5,-29.2 115,-29.2 115.8,-30 119.9,-30 122,-27.9 123.022,-27.9 v1(123.125,-28.004)
  Mid-Layer 1 w0.23: v6@97.7,-21.7 120,-21.7 123.3,-25 123.3,-27.5 123.125,-27.675 v1(123.125,-28.004) ; v1(99.56,-10.985) 103.085,-10.985 v6(103.1,-11)
  Bottom Layer, Bottom w0.23: R39.2@96.2,-10.25 96.21,-10.26 97.6,-10.26 97.84,-10.5 U7.1@99.3,-10.5 ; v6(97.6,-21.6) 97.5,-21.5 97.5,-18.9 103.1,-13.3 v6(103.1,-11)
WM8731_ADC_SD: U4.6 U5.79 | length 14.7
  Top Layer, Top w0.23: U5.79@128.9,-35.7 129.795,-35.7 130.345,-36.25 U4.6@143.4,-36.25
WM8731_BCLK: U4.3 U5.78 | length 19.3
  Top Layer, Top w0.23: v1(126.9,-35.7) 127.4,-36.2 U5.78@128.9,-36.2 ; v1(140.353,-34.663) 140.716,-34.3 U4.3@143.4,-34.3
  Mid-Layer 2 w0.23: v1(126.9,-35.7) 139.316,-35.7 v1(140.353,-34.663)
WM8731_DAC_SD: U4.4 U5.80 | length 15.1
  Top Layer, Top w0.23: U5.80@128.9,-35.2 130.1,-35.2 130.65,-35.75 140.55,-35.75 141.35,-34.95 U4.4@143.4,-34.95
WM8731_SCK: U4.24 U5.84 | length 23.1
  Top Layer, Top w0.23: U5.84@128.9,-33.2 129.928,-33.2 130.428,-33.7 131.4,-33.7 131.7,-34 v1(134,-34) ; v1(147.1,-34.97) 147.471,-34.97 148.101,-35.6 U4.24@150.6,-35.6
  Mid-Layer 2 w0.23: v1(134,-34) 134.154,-34 134.554,-33.6 145.807,-33.6 147.1,-34.893 v1(147.1,-34.97)
WM8731_SDA: U4.23 U5.87 | length 29.3
  Top Layer, Top w0.23: U5.87@128.9,-31.7 130,-31.7 130.9,-30.8 133.9,-30.8 v1(134.1,-31) ; v1(147.491,-36.189) 147.552,-36.25 U4.23@150.6,-36.25
  Mid-Layer 2 w0.23: v1(134.1,-31) 146.609,-31 148.8,-33.191 149.4,-33.791 149.4,-35.782 148.993,-36.189 v1(147.491,-36.189)
WM8731_WS_LRC: U4.5 U4.7 U5.77 | length 18.4
  Top Layer, Top w0.23: U5.77@128.9,-36.7 130.018,-36.7 130.218,-36.9 144.5,-36.9 144.9,-36.5 144.9,-36.05 144.45,-35.6 U4.5@143.4,-35.6
pads on no net: J1.4 J1.5 J1.6 J1.7 J1.8 J1.9 J1.10 J2.3 J2.4 J2.5 J2.6 J2.7 J2.8 J2.9 J2.10 J3.4 J3.6 J3.7 J3.8 J3.9 J3.10 J5.4 J5.5 J5.6 J5.7 J5.8 J5.9 J5.10 J8.4 J8.10 J8.11 JTAG_FPGA.6 JTAG_FPGA.7 JTAG_FPGA.8 JTAG_STM32.9 JTAG_STM32.10 T3.5 T4.5 T6.2 T6.5 T6.8 U1.9 U1.10 U1.14 U1.16 U4.2 U4.12 U4.13 U4.26 U5.2 U5.68 U5.69 U5.83 U5.90 U5.91 U8.25 U8.30 U10.7 U10.10 U10.11 U10.23 U10.24 U10.25 U10.39 U10.76 U10.77 U10.80 U10.83 U10.91 U10.127 U10.128 U10.129 U16.21 U16.22 U16.23 U16.24 U16.25 U16.26 U16.27 U16.28 U16.29 U16.30 U16.33 U16.34 U16.35 U16.36 U16.37 U16.38 U16.39 U16.40 U17.6 U17.7 U20.1 U20.4 U20.5 U20.6 U20.12 U20.15 XG2.1

## Polygon pours and split planes (outlines as drawn)
GND on Bottom Layer, Bottom (solid, remove dead copper, pour order 46): 0,0.07 0,-77.07 187,-77.07 187.07,-77 187,-76.93 187,0
+3V3 on Bottom Layer, Bottom "Bottom Layer, Bottom-3V3" (solid, remove dead copper, pour order 2): 126,-56 126,-68 138,-68 138,-56
GND on Top Solder, Top Mask "Top Layer, Top-GND 2" (solid, pour order 10): 138.6,-75 174.2,-75 174.2,-76.4 138.6,-76.4
GND on Top Solder, Top Mask "Top Layer, Top-GND 1" (solid, pour order 14): 172.1,-76.4 172.1,-49.2 174.3,-49.2 174.3,-76.4
GND on Top Solder, Top Mask "Top Layer, Top-GND 3" (solid, pour order 8): 173,-51.2 138.6,-51.2 138.6,-49.2 173,-49.2
GND on Top Solder, Top Mask "Top Layer, Top-GND 4" (solid, pour order 6): 138.6,-72.2 138.6,-49.2 140.6,-49.2 140.6,-72.2
+3V3 on Mid-Layer 2 "Mid-Layer 2-+3V3" (solid, remove dead copper, pour order 28): 88,0 83.2,-4.8 83.2,-66.4 86.4,-69.6 136.2,-69.6 139.3,-66.5 139.3,-49.9 153.35,-35.85 153.35,-7.55 157.8,-3.1 157.8,0.1
GND on Mid-Layer 2 (solid, remove dead copper, pour order 42): -0.07,0 -0.07,-77 187.07,-77 187.07,0 0.07,0 0,0.07
+3V3 on Mid-Layer 2 (solid, remove dead copper, pour order 32): 60.9,-41.9 50,-52.8 50,-66.1 55,-71.1 77.9,-71.1 80.2,-68.8 80.2,-43.8 78.3,-41.9
+2V5 on Mid-Layer 2 "Mid-Layer 2-+2V5" (solid, remove dead copper, pour order 20): 54.5,-35 55.9,-33.6 57.7,-33.6 63.2,-28.1 63.2,-24.8 62,-23.6 31.4,-23.6 27.1,-27.9 27.1,-41.3 34.7,-48.9 51.4,-48.9 54.5,-45.8
NetC112_1 on Mid-Layer 2 (solid, remove dead copper, pour order 34): 37.3,-9.86 37.3,-18.6 39.8,-21.1 50.1,-21.1 53.5,-17.7 55.97,-17.7 59.7,-13.97 59.7,-11.1 57.8,-9.2 38.4,-9.2
+1V2 on Mid-Layer 2 "Mid-Layer 2-+1V2" (solid, remove dead copper, pour order 18): 51.6,-26.3 50.35,-27.55 50.35,-29.346 51.7,-30.703 51.7,-45.166 49.366,-47.5 30.9,-47.5 30.9,-27.1 32,-26 51.3,-26
+3V3 on Mid-Layer 2 "Mid-Layer 2-+3V3 1" (solid, remove dead copper, pour order 16): 35.2,-45.7 33.953,-44.453 32.3,-42.34 32.3,-31.4 32.335,-31.4 35.235,-28.5 47.4,-28.5 50.4,-31.5 50.4,-42.623 47.323,-45.7
GND on Top Layer, Top (solid, remove dead copper, pour order 44): -0.07,0 0,-0.07 0,-77.07 187,-77.07 187.07,-77 187.07,0 0.5,0 0.3,-0.2
no net on Top Layer, Top "Top Layer, Top-No Net" (solid, remove dead copper, pour order 30): -0.07,-77
GND on Mid-Layer 1 (solid, remove dead copper, pour order 40): -0.2,0.2 -0.07,0.07 -0.07,-77 186.93,-77 187,-77.07 187,0 0.07,0 0,0.07

## Keep-outs
Keep-Out Layer, Board:
  region: 162.25,0 168.85,0 168.85,-3.5 162.25,-3.5
  lines w0.127: 0,-77 0,0 187,0 187,-77 0,-77
  lines w0.14: 0,-77 187,-77 187,0 0,0 0,-77

## Other copper
Top Layer, Top:
  rectangle net NetC124_2: 13.1,-13.5 21.1,-5
  text "1" at 5,-1.7 h1
Mid-Layer 1:
  text "2" at 5.9,-1.7 h1
Mid-Layer 2:
  text "3" at 7.7,-1.7 h1
Bottom Layer, Bottom:
  rectangle net +1V2: 61.5,-37.5 70.45,-24.8
  rectangle net +2V5: 73.15,-41.2 80.4,-25.1
  rectangle net NetC124_2: 13.4,-13.1 20.8,-5
  text "4" at 8.6,-1.7 h1

## Silkscreen, mask and mechanical layers (free items; w line width, h text height)
Top Overlay, Top Silk:
  circle w0.4: c51.6,-47.6 r0.2
  rectangle: 142.9,-7.7 145.6,-7.1
  text "TOP" at 177.9,-2.1 h1
  text "KEY" at 173,-25.4 h1 r90
  text "PHONE" at 173.6,-39.6 h1 r90
  text "UA3REO TRX" at 66.8,-39.7 h2
  text "MOTHERBOARD rev21" at 66.837,-41.8 h1.2
  text "Modified (Tihomir Angelov)" at 66.837,-44 h1.2
  text "12.10.2020" at 66.8,-46 h1.2
  text "LINE" at 174,-51.6 h1 r90
  text "MIC" at 176.2,-70.8 h1
Bottom Overlay, Bot Silk:
  text "BOT" at 180.5,-2.1 h1
  text "FRONT PANEL" at 97,-27.8 h1.3 r90